# Altium PCB cs301_07b.PcbDoc (part 2 of 2)
Units mil, origin at the board's own origin, x right, y up, seen from the top; angles counter-clockwise.
Board outline 3480 x 5007.33 mil, 2 copper layers (Top Layer, Bottom Layer); 134 components, 90 nets, 408 pads, 151 vias.
Unrouted connection lines stored in the file: 2.
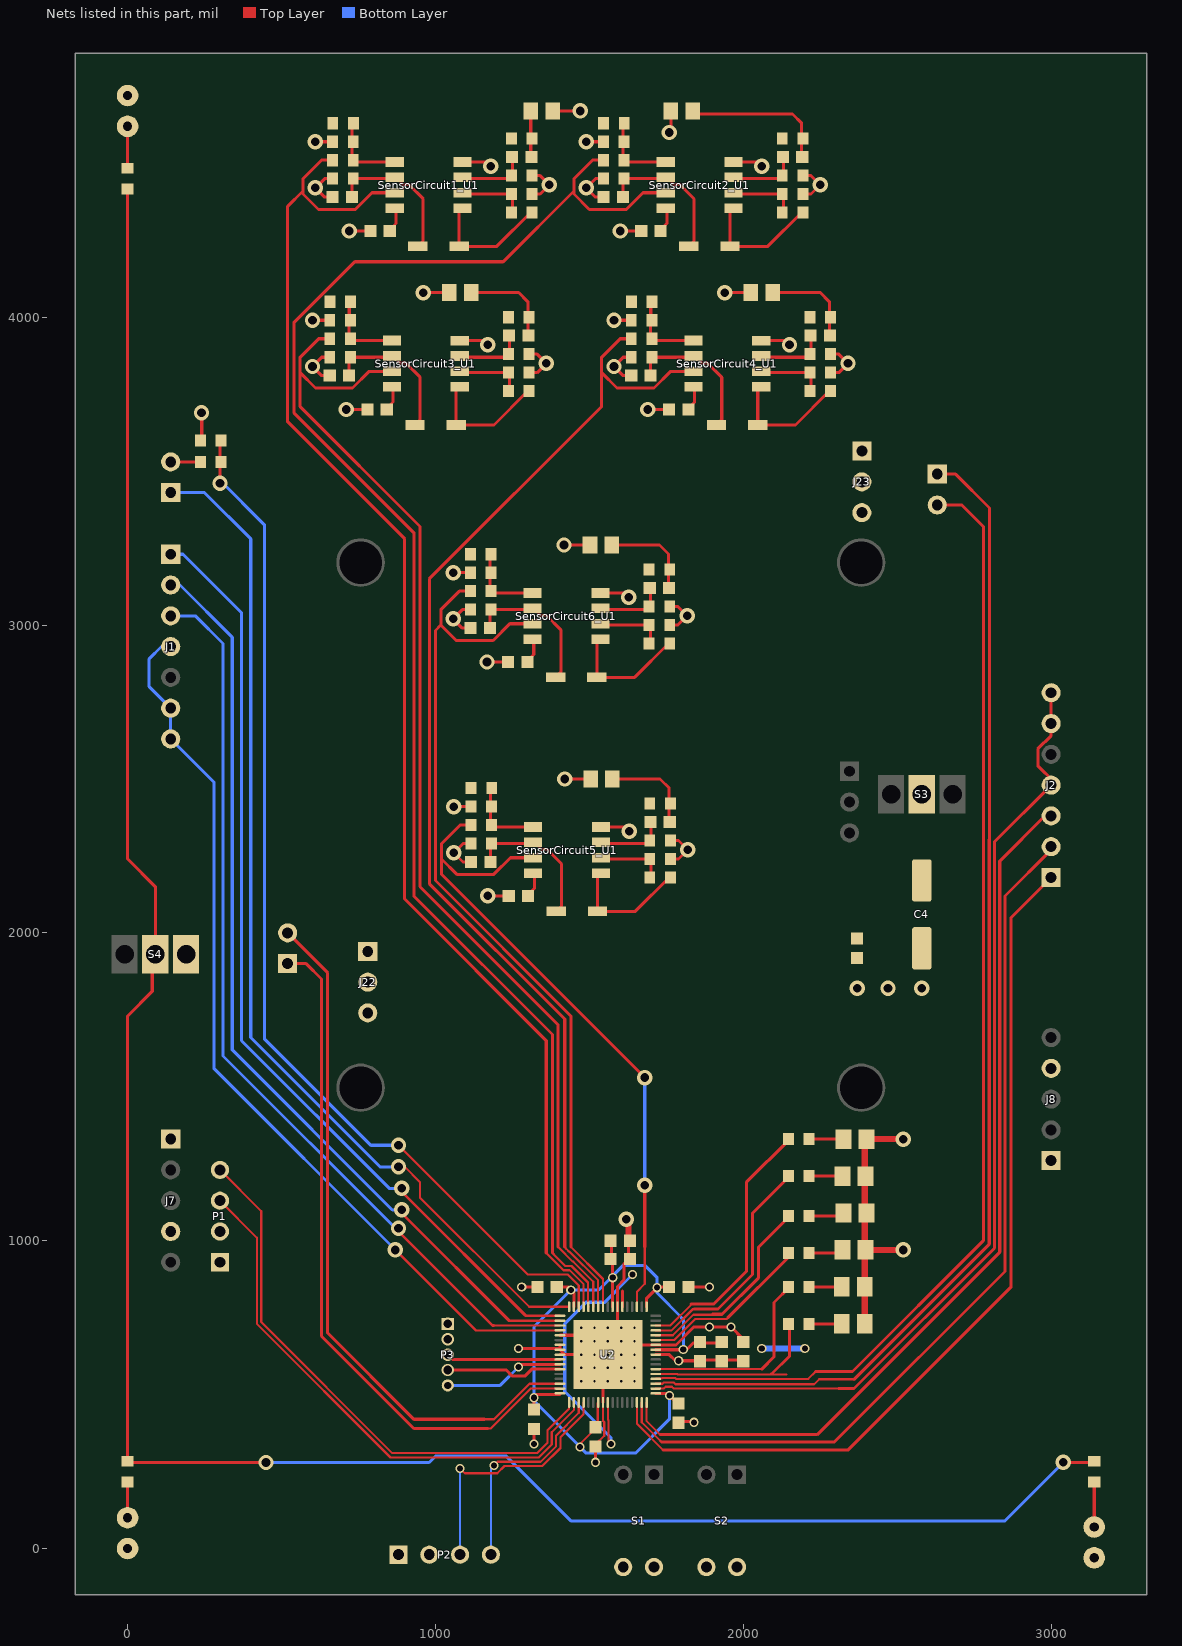
[diagram p2: the nets of this part, all layers, seen from the top]

## Via types
v1: diameter 50, hole 28, Top Layer to Bottom Layer, 99 vias
v2: diameter 19.68, hole 7.87, Top Layer to Bottom Layer, 25 vias
v3: diameter 30, hole 20, Top Layer to Bottom Layer, 23 vias
v4: diameter 40, hole 28, Top Layer to Bottom Layer, 4 vias

## Nets (pads, with @x,y where several pads share a name; then routed paths per layer and width w, separated by ;. In a path a pad name is that pad's centre, name@x,y a point inside that pad or via, vN(x,y) a via of type N, cw(c..) or ccw(c..) an arc to the next point about the centre after c; other vN are vias at no path point) (continued)
GND: C4.2 C5.1 C6.1 C7.1 C8.1 C9.1 C10.1 C11.1 C12.1 C13.1 C14.1 C15.1 D1.K D2.K D3.K D4.2 D5.2 D6.2 D7.2 D8.2 D9.2 J7.4 J8.4 J22.1 J22.2 J22.3 J23.1 J23.2 J23.3 P1.2 P2.2 P3.2 R13.2 SensorCircuit1_C2.1 SensorCircuit1_C3.2 SensorCircuit1_D1.1 SensorCircuit1_R1.2 SensorCircuit1_R5.1 SensorCircuit1_R6.1 SensorCircuit1_R8.1 SensorCircuit1_U1.4 SensorCircuit2_C2.1 SensorCircuit2_C3.2 SensorCircuit2_D1.1 SensorCircuit2_R1.2 SensorCircuit2_R5.1 SensorCircuit2_R6.1 SensorCircuit2_R8.1 SensorCircuit2_U1.4 SensorCircuit3_C2.1 SensorCircuit3_C3.2 SensorCircuit3_D1.1 SensorCircuit3_R1.2 SensorCircuit3_R5.1 SensorCircuit3_R6.1 SensorCircuit3_R8.1 SensorCircuit3_U1.4 SensorCircuit4_C2.1 SensorCircuit4_C3.2 SensorCircuit4_D1.1 SensorCircuit4_R1.2 SensorCircuit4_R5.1 SensorCircuit4_R6.1 SensorCircuit4_R8.1 SensorCircuit4_U1.4 SensorCircuit5_C2.1 SensorCircuit5_C3.2 SensorCircuit5_D1.1 SensorCircuit5_R1.2 SensorCircuit5_R5.1 SensorCircuit5_R6.1 SensorCircuit5_R8.1 SensorCircuit5_U1.4 SensorCircuit6_C2.1 SensorCircuit6_C3.2 SensorCircuit6_D1.1 SensorCircuit6_R1.2 SensorCircuit6_R5.1 SensorCircuit6_R6.1 SensorCircuit6_R8.1 SensorCircuit6_U1.4 U2.5 U2.7 U2.8 U2.9 U2.25 U2.43 U2.45 U2.58 U2.69 | length 6975.5
  Top Layer w7: C10.1@1520,334.88 1520,337.72 1548.22,365.94 1548.22,410.1 1544.25,414.06 U2.25@1544.25,474.49 ; v1(1620,1070) v1@1627.56,1062.44 ; v3@1837.56,412.44 v3(1840,410) ; D4.2@2394.8,1324.8 D4.2@2400,1330
  Top Layer w10: v1(240,3690) 240.94,3689.06 R13.2@240.94,3600 ; v1(600.47,3990) SensorCircuit3_R8.1@660.47,3990 ; v1(610,4570) SensorCircuit1_R8.1@670,4570 ; SensorCircuit3_C2.1@660.47,3810 630.47,3810 v1(600.47,3840) 630.47,3870 SensorCircuit3_R5.1@660.47,3870 ; SensorCircuit1_C2.1@670,4390 640,4390 v1(610,4420) 640,4450 SensorCircuit1_R5.1@670,4450 ; v1(710.47,3700) SensorCircuit3_C3.2@778.98,3700 SensorCircuit3_C3.2@782.91,3700 ; v1(720,4280) SensorCircuit1_C3.2@788.5,4280 SensorCircuit1_C3.2@792.44,4280 ; v1(960.47,4080) SensorCircuit3_D1.1@1045.04,4080 ; v1(1057.56,3170) SensorCircuit6_R8.1@1117.56,3170 ; v1(1059.53,2410) SensorCircuit5_R8.1@1119.53,2410 ; SensorCircuit3_U1.4@1074.88,3924.13 1166.34,3924.13 1170.47,3920 v1(1170.47,3910) ; SensorCircuit1_U1.4@1084.41,4504.13 1175.87,4504.13 1180,4500 v1(1180,4490) ; SensorCircuit6_C2.1@1117.56,2990 1087.56,2990 v1(1057.56,3020) 1087.56,3050 SensorCircuit6_R5.1@1117.56,3050 ; SensorCircuit5_C2.1@1119.53,2230 1089.53,2230 v1(1059.53,2260) 1089.53,2290 SensorCircuit5_R5.1@1119.53,2290 ; v1(1167.56,2880) SensorCircuit6_C3.2@1236.06,2880 SensorCircuit6_C3.2@1240,2880 ; v1(1169.53,2120) SensorCircuit5_C3.2@1238.03,2120 SensorCircuit5_C3.2@1241.97,2120 ; v3(1270,650) 1400.24,650 U2.8@1404.49,645.75 ; v3(1280,850) C6.1@1334.88,850 ; SensorCircuit3_R1.2@1300,3820 1330.47,3820 v1(1360.47,3850) 1330.47,3880 SensorCircuit3_R6.1@1300,3880 ; SensorCircuit1_R1.2@1309.53,4400 1340,4400 v1(1370,4430) 1340,4460 SensorCircuit1_R6.1@1309.53,4460 ; v3(1320,340) C9.1@1320,392.44 ; SensorCircuit1_D1.1@1380.87,4670 v1(1470,4670) ; U2.9@1404.49,630 U2.9@1420.24,630 ; U2.7@1404.49,661.5 U2.8@1404.49,645.75 ; U2.5@1404.49,692.99 1497.01,692.99 v2(1516.69,673.31) v2(1560,630) ; v1(1417.56,3260) SensorCircuit6_D1.1@1502.13,3260 ; v1(1419.53,2500) SensorCircuit5_D1.1@1504.09,2500 ; v1(1490,4570) SensorCircuit2_R8.1@1550,4570 ; C10.1@1510,342.44 1520,332.44 v3(1520,280) ; SensorCircuit6_U1.4@1531.97,3104.13 1623.43,3104.13 1627.56,3100 v1(1627.56,3090) ; SensorCircuit5_U1.4@1533.94,2344.13 1625.39,2344.13 1629.53,2340 v1(1629.53,2330) ; U2.25@1544.25,474.49 1544.25,614.25 v2(1560,630) ; SensorCircuit2_C2.1@1550,4390 1520,4390 v1(1490,4420) 1520,4450 SensorCircuit2_R5.1@1550,4450 ; v1(1580,3990) SensorCircuit4_R8.1@1640,3990 ; v1(1600,4280) SensorCircuit2_C3.2@1668.5,4280 SensorCircuit2_C3.2@1672.44,4280 ; C13.1@1627.56,1000 1627.56,940 1612.72,925.16 1612.72,872.72 1591.5,851.5 U2.58@1591.5,785.51 U2.69@1591.5,661.5 ; SensorCircuit4_C2.1@1640,3810 1610,3810 v1(1580,3840) 1610,3870 SensorCircuit4_R5.1@1640,3870 ; v1(1690,3700) SensorCircuit4_C3.2@1758.5,3700 SensorCircuit4_C3.2@1762.44,3700 ; U2.43@1715.51,630 1760,630 1780,610 v3(1790,610) 1857.56,610 1860,612.44 1930,612.44 2000,612.44 ; SensorCircuit6_R1.2@1757.09,3000 1787.56,3000 v1(1817.56,3030) 1787.56,3060 SensorCircuit6_R6.1@1757.09,3060 ; SensorCircuit5_R1.2@1759.06,2240 1789.53,2240 v1(1819.53,2270) 1789.53,2300 SensorCircuit5_R6.1@1759.06,2300 ; v1(1760,4600) 1764.57,4604.57 SensorCircuit2_D1.1@1764.57,4670 ; C8.1@1790,412.44 v3@1837.56,412.44 ; C7.1@1817.56,850 v3(1890,850) ; v1(1940,4080) SensorCircuit4_D1.1@2024.57,4080 ; SensorCircuit2_U1.4@1964.41,4504.13 2055.87,4504.13 2060,4500 v1(2060,4490) ; C15.1@2000,667.56 2000,680 v3(1960,720) v3(1890,720) 1840,720 1781.5,661.5 U2.45@1715.51,661.5 1665.69,661.5 1655.66,651.46 1637.57,651.46 1627.54,661.5 U2.69@1591.5,661.5 ; SensorCircuit4_U1.4@2054.41,3924.13 2145.87,3924.13 2150,3920 v1(2150,3910) ; SensorCircuit2_R1.2@2189.53,4400 2220,4400 v1(2250,4430) 2220,4460 SensorCircuit2_R6.1@2189.53,4460 ; SensorCircuit4_R1.2@2279.53,3820 2310,3820 v1(2340,3850) 2310,3880 SensorCircuit4_R6.1@2279.53,3880 ; U2.8@1404.49,645.75 U2.9@1420.24,630 ; U2.9@1420.24,630 v2(1473.39,630) v2(1516.69,630) v2(1560,630) ; v2(1560,630) U2.69@1591.5,661.5
  Top Layer w20: C13.1@1627.56,1000 v1@1627.56,1062.44 ; D9.2@2394.8,730 D8.2@2394.8,850 D4.2@2394.8,1324.8 ; D7.2@2397.4,970 v1(2520,970) ; D4.2@2400,1330 v1(2520,1330)
  other v1: 3140,-30 980,-20 0,0 140,1030 300,1030 3000,1560 780,1740 2370,1820 2470,1820 2580,1820 780,1840 780,1940 2385,3365 2385,3465 2385,3565 0,4720
  other v2: 1473.39,543.39 1516.69,543.39 1560,543.39 1603.31,543.39 1646.61,543.39 1473.39,586.69 1516.69,586.69 1560,586.69 1603.31,586.69 1646.61,586.69 1603.31,630 1646.61,630 1473.39,673.31 1560,673.31 1603.31,673.31 1646.61,673.31 1473.39,716.61 1516.69,716.61 1560,716.61 1603.31,716.61 1646.61,716.61
  other v4: 1040,680
Ibat: J11.1 U2.68 | length 3367.7
  Top Layer w7: v1(880,1240) 900,1240 950,1190 950,1140 1304.49,785.51 U2.68@1434.02,785.51
  Bottom Layer w10: J11.1@140,3430 250,3430 400,3280 400,1660 820,1240 v1(880,1240)
LED0: R14.1 U2.49 | length 859.1
  Top Layer w7: U2.49@1715.51,724.49 1763.17,724.49 1833.68,795
  Top Layer w10: 1830,795 1833.68,795 1905,795 2010,900 2010,1189.53 R14.1@2150.47,1330
LED1: R15.1 U2.48 | length 756.5
  Top Layer w7: U2.48@1715.51,708.74 1767.22,708.74 1836.84,778.36
  Top Layer w10: 1840,778 1918,778 2030,890 2030,1089.53 R15.1@2150.47,1210
LED2: R16.1 U2.47 | length 653.7
  Top Layer w7: U2.47@1715.51,692.99 1771.27,692.99 1837.78,759.5 1899.5,759.5 1900,760
  Top Layer w10: 1899.5,761 1931,761 2050,880 2050,979.53 R16.1@2150.47,1080
LED3: R17.1 U2.46 | length 557.7
  Top Layer w7: U2.46@1715.51,677.24 1775.32,677.24 1843.58,745.5 1945.5,745.5 1950,750
  Top Layer w10: 1950,750 2150.47,950.47 R17.1@2150.47,960
LED4: R18.1 U2.40 | length 649.2
  Top Layer w7: U2.40@1715.51,582.76 2060,582.76
  Top Layer w10: 2060,582.76 2100,622.76 2100,799.53 R18.1@2150.47,850
LED5: R19.1 U2.39 | length 614.8
  Top Layer w7: U2.39@1715.51,567.01 1716,567.5 1785.52,567.5 1787.76,565.26 2140,565.26
  Top Layer w10: 2090,566.76 2091.5,566.76 2150.47,625.73 R19.1@2150.47,730
M1_D1: J1.1 U2.1 | length 3108.5
  Top Layer w7: 1292.01,755.98 U2.1@1404.49,755.98
  Top Layer w10: v1(890,1170) 890,1160 1292.01,757.99
  Bottom Layer w10: v1(140,3230) 180,3230 370,3040 370,1650 850,1170 v1(890,1170)
M1_D2: J1.4 J1.6 J1.7 U2.4 | length 2980.1
  Top Layer w7: 1130,708.74 U2.4@1404.49,708.74
  Top Layer w10: v1(870,970) 1130,710
  Bottom Layer w10: v1(140,2930) 110,2930 70,2890 70,2800 v1(140,2730) v1(140,2630) 280,2490 280,1560 v1(870,970)
M1_IN1: J1.3 U2.3 | length 3010.3
  Top Layer w7: 1190,724.49 U2.3@1404.49,724.49
  Top Layer w10: v1(880,1040) 880,1030 1185.51,724.49 1190,724.49
  Bottom Layer w10: v1(140,3030) 220,3030 310,2940 310,1600 870,1040 v1(880,1040)
M1_IN2: J1.2 U2.2 | length 3045.3
  Top Layer w7: 1239.76,740.24 U2.2@1404.49,740.24
  Top Layer w10: v1(890,1100) 890,1090 1239.76,740.24 1239.88,740.12
  Bottom Layer w10: v1(140,3130) 170,3130 340,2960 340,1620 860,1100 v1(890,1100)
M1_QA: J14.1 U2.16 | length 2243.2
  Top Layer w7: 1170,390 1180,390 1309.76,519.76 U2.16@1404.49,519.76
  Top Layer w10: v1(520,1900) 580,1900 630,1850 630,690 930,390 1170,390
M1_QB: J14.2 U2.15 | length 2272.2
  Top Layer w7: 1160,420 1190,420 1305.51,535.51 U2.15@1404.49,535.51
  Top Layer w10: v1(520,2000) 650,1870 650,700 930,420 1160,420
M2_D1: J2.1 U2.32 | length 2923.9
  Top Layer w7: U2.32@1654.49,474.49 1654.49,405.11 1740,319.6
  Top Layer w10: 1740,319.6 2339.6,319.6 2870,850 2870,2050 v1(3000,2180)
M2_D2: J2.4 J2.6 J2.7 U2.36 | length 3218.3
  Top Layer w7: U2.36@1715.51,519.76 1742.06,519.76 1747.8,525.5 1768.12,525.5 1773.86,519.76 2309.76,519.76
  Top Layer w10: 2309.76,519.76 2359.76,519.76 2816,976 2816,2296 v1(3000,2480) 3010,2490 2957,2543 2957,2597.81 3000,2640.81 v1(3000,2680) v1(3000,2780)
M2_IN1: J2.3 U2.34 | length 2969.2
  Top Layer w7: U2.34@1685.98,474.49 1685.98,414.02 1730,370
  Top Layer w10: 1730,370 2240,370 2833,963 2833,2233 2980,2380 v1(3000,2380)
M2_IN2: J2.2 U2.33 | length 2942.5
  Top Layer w7: U2.33@1670.24,474.49 1670.24,409.76 1730,350 1730.2,350 1734.2,346
  Top Layer w10: 1734.2,346 2296,346 2850,900 2850,2120 3000,2270 v1(3000,2280)
M2_QA: J15.1 U2.37 | length 3883.1
  Top Layer w7: U2.37@1715.51,535.51 1738.01,535.51 1742,539.5 1773.92,539.5 1779.66,533.76 2230,533.76 2246.24,550 2360,550
  Top Layer w10: 2360,550 2799,989 2799,2303.04 2800,2304.04 2800,3380 2690,3490 J15.1@2630,3490
M2_QB: J15.2 U2.38 | length 3751.2
  Top Layer w7: U2.38@1715.51,551.26 1716.82,552.57 1735.27,552.57 1736.2,553.5 1779.72,553.5 1781.96,551.26 2211.26,551.26 2235,575
  Top Layer w10: 2235,575 2355,575 2780,1000 2780,3320 2710,3390 J15.2@2630,3390
NetD1_A: D1.A R9.2 | length 120.5
  Top Layer w10: v1(0,100) R9.2@0,220.47
NetD2_A: D2.A R10.2 | length 140
  Top Layer w10: R10.2@0,4480 v1(0,4620)
NetD3_A: D3.A R11.2 | length 150.5
  Top Layer w10: v1(3140,70) R11.2@3140,220.47
NetD4_1: D4.1 R14.2 | length 105.7
  Top Layer w10: R14.2@2219.53,1330 D4.1@2325.2,1330
NetD5_1: D5.1 R15.2 | length 113.1
  Top Layer w10: R15.2@2209.53,1210 D5.1@2322.6,1210
NetD6_1: D6.1 R16.2 | length 119.8
  Top Layer w10: R16.2@2209.53,1080 2315.2,1080 D6.1@2325.2,1090
NetD7_1: D7.1 R17.2 | length 117.2
  Top Layer w10: R17.2@2209.53,960 2312.6,960 D7.1@2322.6,970
NetD8_1: D8.1 R18.2 | length 110.5
  Top Layer w10: R18.2@2209.53,850 R18.2@2213.46,850 D8.1@2320,850
NetD9_1: D9.1 R19.2 | length 110.5
  Top Layer w10: R19.2@2209.53,730 D9.1@2320,730
NetJ11_2: J11.2 R12.1 | length 100.5
  Top Layer w10: J11.2@140,3530 R12.1@236.54,3530 R12.1@240.47,3530
NetR9_1: R9.1 R10.1 R11.1 S4.2 | length 7531
  Top Layer w10: R10.1@0,4420.94 0,2240 90,2150 S4.2@90,1930 80,1920 80,1810 0,1730 0,279.53 v1(449.53,279.53) v1@450,280 ; v1(3040,280) 3139.53,280 R11.1@3140,279.53
  Bottom Layer w10: v1(449.53,279.53) 979.53,279.53 1000,300 1230,300 1440,90 2850,90 v1(3040,280)
NetSensorCircuit1_C1_1: SensorCircuit1_C1.1 SensorCircuit1_R6.2 SensorCircuit1_U1.3 | length 232.7
  Top Layer w10: SensorCircuit1_U1.3@1084.41,4454.13 1088.54,4450 1240.47,4450 1250.47,4460 1250.47,4518.03 SensorCircuit1_C1.1@1252.44,4520
NetSensorCircuit1_C1_2: SensorCircuit1_C1.2 SensorCircuit1_D1.2 SensorCircuit1_R4.1 | length 151
  Top Layer w10: SensorCircuit1_C1.2@1307.56,4520 1309.53,4521.97 1309.53,4669.53 SensorCircuit1_D1.2@1310,4670
NetSensorCircuit1_C2_2: SensorCircuit1_C2.2 SensorCircuit1_D2.2 SensorCircuit1_R5.2 SensorCircuit1_U1.6 | length 484.6
  Top Layer w10: SensorCircuit1_C2.2@725.12,4390 729.06,4393.94 729.06,4450 SensorCircuit1_R5.2@732.99,4450 867.68,4450 871.81,4454.13 895,4430.94 913.46,4430.94 960,4384.4 960,4246.93 SensorCircuit1_D2.2@943.07,4230
NetSensorCircuit1_D2_1: SensorCircuit1_D2.1 SensorCircuit1_R2.2 SensorCircuit1_U1.1 | length 405.4
  Top Layer w10: SensorCircuit1_U1.1@1084.41,4354.13 1076.93,4346.65 SensorCircuit1_D2.1@1076.93,4230 1199.53,4230 SensorCircuit1_R2.2@1309.53,4340
NetSensorCircuit1_R1_1: SensorCircuit1_R1.1 SensorCircuit1_R2.1 SensorCircuit1_U1.2 | length 227.8
  Top Layer w10: SensorCircuit1_U1.2@1084.41,4404.13 1088.54,4400 1250.47,4400 SensorCircuit1_R2.1@1250.47,4340
NetSensorCircuit1_R3_1: SensorCircuit1_R3.1 SensorCircuit1_R7.2 SensorCircuit1_R8.2 SensorCircuit1_U1.5 | length 263
  Top Layer w10: SensorCircuit1_R7.2@729.06,4504.13 SensorCircuit1_U1.5@867.87,4504.13 SensorCircuit1_U1.5@871.81,4504.13 ; SensorCircuit1_R7.2@729.06,4510 729.06,4570 729.53,4570.47 SensorCircuit1_R3.1@729.53,4630
NetSensorCircuit2_C1_1: SensorCircuit2_C1.1 SensorCircuit2_R6.2 SensorCircuit2_U1.3 | length 232.7
  Top Layer w10: SensorCircuit2_U1.3@1964.41,4454.13 1968.54,4450 2120.47,4450 2130.47,4460 2130.47,4518.03 SensorCircuit2_C1.1@2132.44,4520
NetSensorCircuit2_C1_2: SensorCircuit2_C1.2 SensorCircuit2_D1.2 SensorCircuit2_R4.1 | length 473
  Top Layer w10: SensorCircuit2_D1.2@1840,4660 2160,4660 2189.53,4630.47 2189.53,4521.97 SensorCircuit2_C1.2@2187.56,4520
NetSensorCircuit2_C2_2: SensorCircuit2_C2.2 SensorCircuit2_D2.2 SensorCircuit2_R5.2 SensorCircuit2_U1.6 | length 484.6
  Top Layer w10: SensorCircuit2_C2.2@1605.12,4390 1609.06,4393.94 1609.06,4450 SensorCircuit2_R5.2@1612.99,4450 1747.68,4450 1751.81,4454.13 1775,4430.94 1793.46,4430.94 1840,4384.4 1840,4246.93 SensorCircuit2_D2.2@1823.07,4230
NetSensorCircuit2_D2_1: SensorCircuit2_D2.1 SensorCircuit2_R2.2 SensorCircuit2_U1.1 | length 405.4
  Top Layer w10: SensorCircuit2_U1.1@1964.41,4354.13 1956.93,4346.65 SensorCircuit2_D2.1@1956.93,4230 2079.53,4230 SensorCircuit2_R2.2@2189.53,4340
NetSensorCircuit2_R1_1: SensorCircuit2_R1.1 SensorCircuit2_R2.1 SensorCircuit2_U1.2 | length 227.8
  Top Layer w10: SensorCircuit2_U1.2@1964.41,4404.13 1968.54,4400 2130.47,4400 SensorCircuit2_R2.1@2130.47,4340
NetSensorCircuit2_R3_1: SensorCircuit2_R3.1 SensorCircuit2_R7.2 SensorCircuit2_R8.2 SensorCircuit2_U1.5 | length 263
  Top Layer w10: SensorCircuit2_R7.2@1609.06,4504.13 SensorCircuit2_U1.5@1747.87,4504.13 SensorCircuit2_U1.5@1751.81,4504.13 ; SensorCircuit2_R7.2@1609.06,4510 1609.06,4570 1609.53,4570.47 SensorCircuit2_R3.1@1609.53,4630
NetSensorCircuit3_C1_1: SensorCircuit3_C1.1 SensorCircuit3_R6.2 SensorCircuit3_U1.3 | length 232.7
  Top Layer w10: SensorCircuit3_U1.3@1074.88,3874.13 1079.02,3870 1230.94,3870 1240.94,3880 1240.94,3938.03 SensorCircuit3_C1.1@1242.91,3940
NetSensorCircuit3_C1_2: SensorCircuit3_C1.2 SensorCircuit3_D1.2 SensorCircuit3_R4.1 | length 307.6
  Top Layer w10: SensorCircuit3_D1.2@1115.91,4080 1270.47,4080 1300,4050.47 1300,3941.97 SensorCircuit3_C1.2@1298.03,3940
NetSensorCircuit3_C2_2: SensorCircuit3_C2.2 SensorCircuit3_D2.2 SensorCircuit3_R5.2 SensorCircuit3_U1.6 | length 484.6
  Top Layer w10: SensorCircuit3_C2.2@715.59,3810 719.53,3813.94 719.53,3870 SensorCircuit3_R5.2@723.46,3870 858.15,3870 862.28,3874.13 885.47,3850.95 903.93,3850.95 950.47,3804.4 950.47,3666.93 SensorCircuit3_D2.2@933.54,3650
NetSensorCircuit3_D2_1: SensorCircuit3_D2.1 SensorCircuit3_R2.2 SensorCircuit3_U1.1 | length 405.4
  Top Layer w10: SensorCircuit3_U1.1@1074.88,3774.13 1067.4,3766.65 SensorCircuit3_D2.1@1067.4,3650 1190,3650 SensorCircuit3_R2.2@1300,3760
NetSensorCircuit3_R1_1: SensorCircuit3_R1.1 SensorCircuit3_R2.1 SensorCircuit3_U1.2 | length 227.8
  Top Layer w10: SensorCircuit3_U1.2@1074.88,3824.13 1079.02,3820 1240.94,3820 SensorCircuit3_R2.1@1240.94,3760
NetSensorCircuit3_R3_1: SensorCircuit3_R3.1 SensorCircuit3_R7.2 SensorCircuit3_R8.2 SensorCircuit3_U1.5 | length 263
  Top Layer w10: SensorCircuit3_R7.2@719.53,3924.13 SensorCircuit3_U1.5@858.35,3924.13 SensorCircuit3_U1.5@862.28,3924.13 ; SensorCircuit3_R7.2@719.53,3930 719.53,3990 720,3990.47 SensorCircuit3_R3.1@720,4050
NetSensorCircuit4_C1_1: SensorCircuit4_C1.1 SensorCircuit4_R6.2 SensorCircuit4_U1.3 | length 232.7
  Top Layer w10: SensorCircuit4_U1.3@2054.41,3874.13 2058.54,3870 2210.47,3870 2220.47,3880 2220.47,3938.03 SensorCircuit4_C1.1@2222.44,3940
NetSensorCircuit4_C1_2: SensorCircuit4_C1.2 SensorCircuit4_D1.2 SensorCircuit4_R4.1 | length 307.6
  Top Layer w10: SensorCircuit4_D1.2@2095.43,4080 2250,4080 2279.53,4050.47 2279.53,3941.97 SensorCircuit4_C1.2@2277.56,3940
NetSensorCircuit4_C2_2: SensorCircuit4_C2.2 SensorCircuit4_D2.2 SensorCircuit4_R5.2 SensorCircuit4_U1.6 | length 484.6
  Top Layer w10: SensorCircuit4_C2.2@1695.12,3810 1699.06,3813.94 1699.06,3870 SensorCircuit4_R5.2@1702.99,3870 1837.68,3870 1841.81,3874.13 1865,3850.94 1883.46,3850.94 1930,3804.4 1930,3666.93 SensorCircuit4_D2.2@1913.07,3650
NetSensorCircuit4_D2_1: SensorCircuit4_D2.1 SensorCircuit4_R2.2 SensorCircuit4_U1.1 | length 405.4
  Top Layer w10: SensorCircuit4_U1.1@2054.41,3774.13 2046.93,3766.65 SensorCircuit4_D2.1@2046.93,3650 2169.53,3650 SensorCircuit4_R2.2@2279.53,3760
NetSensorCircuit4_R1_1: SensorCircuit4_R1.1 SensorCircuit4_R2.1 SensorCircuit4_U1.2 | length 227.8
  Top Layer w10: SensorCircuit4_U1.2@2054.41,3824.13 2058.54,3820 2220.47,3820 SensorCircuit4_R2.1@2220.47,3760
NetSensorCircuit4_R3_1: SensorCircuit4_R3.1 SensorCircuit4_R7.2 SensorCircuit4_R8.2 SensorCircuit4_U1.5 | length 263
  Top Layer w10: SensorCircuit4_R7.2@1699.06,3924.13 SensorCircuit4_U1.5@1837.87,3924.13 SensorCircuit4_U1.5@1841.81,3924.13 ; SensorCircuit4_R7.2@1699.06,3930 1699.06,3990 1699.53,3990.47 SensorCircuit4_R3.1@1699.53,4050
NetSensorCircuit5_C1_1: SensorCircuit5_C1.1 SensorCircuit5_R6.2 SensorCircuit5_U1.3 | length 232.7
  Top Layer w10: SensorCircuit5_U1.3@1533.94,2294.13 1538.07,2290 1690,2290 1700,2300 1700,2358.03 SensorCircuit5_C1.1@1701.97,2360
NetSensorCircuit5_C1_2: SensorCircuit5_C1.2 SensorCircuit5_D1.2 SensorCircuit5_R4.1 | length 307.6
  Top Layer w10: SensorCircuit5_D1.2@1574.96,2500 1729.53,2500 1759.06,2470.47 1759.06,2361.97 SensorCircuit5_C1.2@1757.09,2360
NetSensorCircuit5_C2_2: SensorCircuit5_C2.2 SensorCircuit5_D2.2 SensorCircuit5_R5.2 SensorCircuit5_U1.6 | length 484.6
  Top Layer w10: SensorCircuit5_C2.2@1174.65,2230 1178.58,2233.94 1178.58,2290 SensorCircuit5_R5.2@1182.52,2290 1317.2,2290 1321.34,2294.13 1344.53,2270.94 1362.98,2270.94 1409.53,2224.4 1409.53,2086.93 SensorCircuit5_D2.2@1392.6,2070
NetSensorCircuit5_D2_1: SensorCircuit5_D2.1 SensorCircuit5_R2.2 SensorCircuit5_U1.1 | length 405.4
  Top Layer w10: SensorCircuit5_U1.1@1533.94,2194.13 1526.46,2186.65 SensorCircuit5_D2.1@1526.46,2070 1649.06,2070 SensorCircuit5_R2.2@1759.06,2180
NetSensorCircuit5_R1_1: SensorCircuit5_R1.1 SensorCircuit5_R2.1 SensorCircuit5_U1.2 | length 227.8
  Top Layer w10: SensorCircuit5_U1.2@1533.94,2244.13 1538.07,2240 1700,2240 SensorCircuit5_R2.1@1700,2180
NetSensorCircuit5_R3_1: SensorCircuit5_R3.1 SensorCircuit5_R7.2 SensorCircuit5_R8.2 SensorCircuit5_U1.5 | length 263
  Top Layer w10: SensorCircuit5_R7.2@1178.58,2344.13 SensorCircuit5_U1.5@1317.4,2344.13 SensorCircuit5_U1.5@1321.34,2344.13 ; SensorCircuit5_R7.2@1178.58,2350 1178.58,2410 1179.06,2410.47 SensorCircuit5_R3.1@1179.06,2470
NetSensorCircuit6_C1_1: SensorCircuit6_C1.1 SensorCircuit6_R6.2 SensorCircuit6_U1.3 | length 232.7
  Top Layer w10: SensorCircuit6_U1.3@1531.97,3054.13 1536.1,3050 1688.03,3050 1698.03,3060 1698.03,3118.03 SensorCircuit6_C1.1@1700,3120
NetSensorCircuit6_C1_2: SensorCircuit6_C1.2 SensorCircuit6_D1.2 SensorCircuit6_R4.1 | length 307.6
  Top Layer w10: SensorCircuit6_D1.2@1572.99,3260 1727.56,3260 1757.09,3230.47 1757.09,3121.97 SensorCircuit6_C1.2@1755.12,3120
NetSensorCircuit6_C2_2: SensorCircuit6_C2.2 SensorCircuit6_D2.2 SensorCircuit6_R5.2 SensorCircuit6_U1.6 | length 484.6
  Top Layer w10: SensorCircuit6_C2.2@1172.68,2990 1176.61,2993.94 1176.61,3050 SensorCircuit6_R5.2@1180.55,3050 1315.24,3050 1319.37,3054.13 1342.56,3030.94 1361.02,3030.94 1407.56,2984.4 1407.56,2846.93 SensorCircuit6_D2.2@1390.63,2830
NetSensorCircuit6_D2_1: SensorCircuit6_D2.1 SensorCircuit6_R2.2 SensorCircuit6_U1.1 | length 405.4
  Top Layer w10: SensorCircuit6_U1.1@1531.97,2954.13 1524.49,2946.65 SensorCircuit6_D2.1@1524.49,2830 1647.09,2830 SensorCircuit6_R2.2@1757.09,2940
NetSensorCircuit6_R1_1: SensorCircuit6_R1.1 SensorCircuit6_R2.1 SensorCircuit6_U1.2 | length 227.8
  Top Layer w10: SensorCircuit6_U1.2@1531.97,3004.13 1536.1,3000 1698.03,3000 SensorCircuit6_R2.1@1698.03,2940
NetSensorCircuit6_R3_1: SensorCircuit6_R3.1 SensorCircuit6_R7.2 SensorCircuit6_R8.2 SensorCircuit6_U1.5 | length 263
  Top Layer w10: SensorCircuit6_R7.2@1176.61,3104.13 SensorCircuit6_U1.5@1315.43,3104.13 SensorCircuit6_U1.5@1319.37,3104.13 ; SensorCircuit6_R7.2@1176.61,3110 1176.61,3170 1177.09,3170.47 SensorCircuit6_R3.1@1177.09,3230
NetU2_26: U2.26 U2.57 | length 928.8
  Top Layer w7: U2.26@1560,474.49 1560,418.11 1562.22,415.9 1562.22,347.78 v3(1570,340)
  Top Layer w10: U2.57@1607.24,785.51 1607.24,837.24
  Bottom Layer w10: v3(1570,340) 1570,360 1420,510 1420,730 1490,800 1550,800 v3(1640,890)
RESET: P3.3 U2.10 | length 371
  Top Layer w10: v4(1040,630) 1055.75,614.25 U2.10@1404.49,614.25
RX1: P2.4 U2.20 | length 694.5
  Top Layer w7: v3(1190,270) 1202,282 1341.6,282 1392,332.4 1392,367.47 1465.51,440.98 U2.20@1465.51,474.49
  Bottom Layer w7: P2.4@1180,-20 1180,260 v3(1190,270)
RX2: P1.4 U2.18 | length 1829.5
  Top Layer w7: v1(300,1230) 434,1096 434,736 860,310 1330,310 1364,344 1364,384 1434.02,454.02 U2.18@1434.02,474.49
SO1: SensorCircuit1_R7.1 SensorCircuit1_U1.7 U2.65 | length 4574.8
  Top Layer w7: 1360,960.2 1416.2,904 1436,904 1481.26,858.74 U2.65@1481.26,785.51
  Top Layer w10: SensorCircuit1_R7.1@670,4510 SensorCircuit1_R7.1@666.06,4510 630,4510 570,4450 570,4410 ; SensorCircuit1_U1.7@871.81,4404.13 SensorCircuit1_U1.7@867.87,4404.13 794.13,4404.13 740,4350 620,4350 570,4400 570,4410 ; 1360,960.2 1360,1650 900,2110 900,3280 520,3660 520,4360 570,4410
SO2: SensorCircuit2_R7.1 SensorCircuit2_U1.7 U2.64 | length 5211.5
  Top Layer w7: 1380,960 1390,950 1422,918 1441.8,918 1495.7,864.1 1495.7,786.82 U2.64@1497.01,785.51
  Top Layer w10: 1380,960 1380,1670 930,2120 930,3300 540,3690 540,3981.85 738.15,4180 1220,4180 1450,4410 ; SensorCircuit2_R7.1@1550,4510 SensorCircuit2_R7.1@1546.06,4510 1510,4510 1450,4450 1450,4410 ; SensorCircuit2_U1.7@1751.81,4404.13 SensorCircuit2_U1.7@1747.87,4404.13 1674.13,4404.13 1620,4350 1500,4350 1450,4400 1450,4410
SO3: SensorCircuit3_R7.1 SensorCircuit3_U1.7 U2.63 | length 3950.5
  Top Layer w7: 1398.08,980 1399.6,980 1399.6,978.48 1446.08,932 1447.6,932 1512.76,866.84 U2.63@1512.76,785.51
  Top Layer w10: SensorCircuit3_R7.1@660.47,3930 SensorCircuit3_R7.1@656.54,3930 620.47,3930 560.47,3870 560.47,3820 ; SensorCircuit3_U1.7@862.28,3824.13 SensorCircuit3_U1.7@858.35,3824.13 784.61,3824.13 730.47,3770 610.47,3770 560.47,3820 ; 1398.08,980 1398.08,1701.92 950,2150 950,3320 560.47,3709.53 560.47,3820
SO4: SensorCircuit4_R7.1 SensorCircuit4_U1.7 U2.62 | length 4014.6
  Top Layer w7: 1420,980 1424.5,975.5 1424.5,973.58 1433.58,964.5 1435.5,964.5 1528.5,871.5 U2.62@1528.5,785.51
  Top Layer w10: 1420,980 1420,1720 980,2160 980,3150 1540,3710 1540,3820 ; SensorCircuit4_R7.1@1640,3930 SensorCircuit4_R7.1@1636.06,3930 1600,3930 1540,3870 1540,3820 ; SensorCircuit4_U1.7@1841.81,3824.13 SensorCircuit4_U1.7@1837.87,3824.13 1764.13,3824.13 1710,3770 1590,3770 1540,3820
SO5: SensorCircuit5_R7.1 SensorCircuit5_U1.7 U2.54 | length 2258.4
  Top Layer w7: U2.54@1654.49,785.51 1654.49,834.49 1680,860 1680,980
  Top Layer w10: SensorCircuit5_R7.1@1119.53,2350 SensorCircuit5_R7.1@1115.59,2350 1079.53,2350 1019.53,2290 1019.53,2240 ; SensorCircuit5_U1.7@1321.34,2244.13 SensorCircuit5_U1.7@1317.4,2244.13 1243.66,2244.13 1189.53,2190 1069.53,2190 1019.53,2240 ; 1680,980 v1(1680,1180) ; v1(1680,1530) 1019.53,2190.47 1019.53,2240
  Bottom Layer w10: v1(1680,1180) v1(1680,1530)
SO6: SensorCircuit6_R7.1 SensorCircuit6_U1.7 U2.61 | length 2967
  Top Layer w7: 1440,980 1544.25,875.75 U2.61@1544.25,785.51
  Top Layer w10: SensorCircuit6_R7.1@1117.56,3110 SensorCircuit6_R7.1@1113.62,3110 1077.56,3110 1017.56,3050 1017.56,3000 ; SensorCircuit6_U1.7@1319.37,3004.13 SensorCircuit6_U1.7@1315.43,3004.13 1241.69,3004.13 1187.56,2950 1067.56,2950 1017.56,3000 ; 1440,980 1440,1730 1000,2170 1000,2982.44 1017.56,3000
SWDCK: P3.4 U2.12 | length 382.2
  Top Layer w10: v4(1040,580) 1230,580 1250,560 1290,560 1312.76,582.76 U2.12@1404.49,582.76
SWDIO: P3.5 U2.11 | length 392.9
  Top Layer w10: v3(1270,590) 1278.5,598.5 U2.11@1404.49,598.5
  Bottom Layer w10: P3.5@1040,530 1210,530 v3(1270,590)
TX1: P2.3 U2.21 | length 825.5
  Top Layer w7: v3(1080,260) 1095.5,244.5 1200.56,244.5 1224.06,268 1347.4,268 1406,326.6 1406,361.67 1481.26,436.93 U2.21@1481.26,474.49
  Bottom Layer w7: P2.3@1080,-20 v3(1080,260)
TX2: P1.3 U2.19 | length 1771
  Top Layer w7: v1(300,1130) 420,1010 420,730 854,296 1335.8,296 1378,338.2 1378,378 1449.76,449.76 U2.19@1449.76,474.49
Vbat: R12.2 R13.1 U2.66 | length 3436.5
  Top Layer w7: v1(880,1310) 1300,890 1430,890 1465.51,854.49 U2.66@1465.51,785.51
  Top Layer w10: v1(300,3460) 299.53,3460.47 299.53,3530 300,3530.47 R13.1@300,3600
  Bottom Layer w10: v1@300,3470 444.04,3325.96 444.04,1655.96 790,1310 v1(880,1310)
VCC: C4.1 C5.2 C6.2 C7.2 C8.2 C9.2 C10.2 C11.2 C12.2 C13.2 C14.2 C15.2 J7.1 J8.1 P1.1 P2.1 P3.1 S1.3 S1.4 S2.3 S2.4 S3.2 S4.3 SensorCircuit1_C3.1 SensorCircuit1_R3.2 SensorCircuit1_R4.2 SensorCircuit1_U1.8 SensorCircuit2_C3.1 SensorCircuit2_R3.2 SensorCircuit2_R4.2 SensorCircuit2_U1.8 SensorCircuit3_C3.1 SensorCircuit3_R3.2 SensorCircuit3_R4.2 SensorCircuit3_U1.8 SensorCircuit4_C3.1 SensorCircuit4_R3.2 SensorCircuit4_R4.2 SensorCircuit4_U1.8 SensorCircuit5_C3.1 SensorCircuit5_R3.2 SensorCircuit5_R4.2 SensorCircuit5_U1.8 SensorCircuit6_C3.1 SensorCircuit6_R3.2 SensorCircuit6_R4.2 SensorCircuit6_U1.8 U2.17 U2.24 U2.35 U2.44 U2.52 U2.59 U2.67 | length 3350.6
  Top Layer w7: v3(1470,330) 1470,340 1527.19,397.19 1527.19,473.18 U2.24@1528.5,474.49
  Top Layer w10: SensorCircuit3_C3.1@838.03,3700 862.28,3724.25 SensorCircuit3_U1.8@862.28,3774.13 ; SensorCircuit1_C3.1@847.56,4280 871.81,4304.25 SensorCircuit1_U1.8@871.81,4354.13 ; SensorCircuit6_C3.1@1295.12,2880 1319.37,2904.25 SensorCircuit6_U1.8@1319.37,2954.13 ; SensorCircuit5_C3.1@1297.09,2120 1321.34,2144.25 SensorCircuit5_U1.8@1321.34,2194.13 ; C9.2@1320,447.56 v3(1320,490) 1330.83,500.83 U2.17@1404.49,500.83 ; C6.2@1390,850 1430,850 v3(1439.88,840.12) 1449.76,830.24 U2.67@1449.76,785.51 ; C11.2@1572.44,940 C13.2@1572.44,1000 ; U2.59@1575.75,785.51 v3(1575.75,880) C11.2@1575.75,940 ; U2.52@1685.98,785.51 1685.98,813.54 v3(1720,847.56) 1722.44,850 C7.2@1762.44,850 ; U2.35@1715.51,504.02 1753.54,504.02 v3(1760,497.56) C8.2@1790,467.56 ; U2.44@1715.51,645.75 1803.93,645.75 v3(1805.18,647) 1817,647 1837.56,667.56 C14.2@1930,667.56 ; SensorCircuit2_C3.1@1727.56,4280 1751.81,4304.25 SensorCircuit2_U1.8@1751.81,4354.13 ; SensorCircuit4_C3.1@1817.56,3700 1841.81,3724.25 SensorCircuit4_U1.8@1841.81,3774.13
  Bottom Layer w10: v3(1760,497.56) 1760,420 1650,310 1490,310 v3(1470,330) 1320,480 v3(1320,490) 1320,720.24 v3(1439.88,840.12) 1530.12,840.12 1570,880 v3(1575.75,880) 1575.75,885.75 1610,920 1680,920 1720,880 v3(1720,847.56) 1720,830 1800.91,749.09 1800,748.19 1805.18,743.01 v3(1805.18,647)
  Bottom Layer w20: v3(2060,650) v3(2200,650)
  other v1: 880,-20 300,930 3000,1260 140,1330 2580,2450
  other v4: 1040,730
pads on no net: C4.0 J1.5 J2.5 J7.5 J8.2 J8.3 J8.5 S3.1 S4.1 U2.6 U2.13 U2.14 U2.31 U2.41 U2.42 U2.50 U2.51 U2.53 U2.55 U2.56 U2.60
copper on no net: | length 66.3
  Top Layer w10: 1607.24,837.24 1627.24,857.24 1640,870 1640,890
  other v1: 3000,2580 140,2830

## Polygon pours and split planes (outlines as drawn)
VCC on Top Layer "Vcc" (solid, remove dead copper, pour order 6): -160,-140 -160,4830 -140,4850 3300,4850 3300,-140
GND on Top Layer "Ground" (solid, pour order 2): 2620,2020 2620,1770 2290,1770 2290,1930 2300,1940 2390,1940
5V0 on Top Layer "5V0" (solid, pour order 0): 2300,2270 2460,2270 2530,2340 2530,2530 2480,2580 2290,2580
GND on Bottom Layer "Ground" (solid, pour order 8): 1470,740 1480,750 1690,750 1690,500 1680,490 1660,510 1450,510 1450,721.84 1459.08,730.92
GND on Bottom Layer "Ground" (solid, pour order 4): -160,-140 -150,-130 -150,4850 3300,4850 3300,-140

## Keep-outs
Keep-Out Layer:
  lines w10: -160,-150 3300,-150 3300,4850 -160,4850 -160,-150

## Other copper
Top Layer:
  text "CS 301 / Group 7" at 2550,4440 h60

## Silkscreen, mask and mechanical layers (free items; w line width, h text height)
Top Overlay:
  text "Vbat" at 210,3545 h40
  text "Ibat" at 195,3405 h40
  text "D1" at 200,3205 h40
  text "IN2" at 195,3105 h40
  text "IN1" at 195,3005 h40
  text "SLW" at 190,2915 h40
  text "INV" at 195,2815 h40
  text "D2" at 2865,2765 h40
  text "EN" at 200,2720 h40
  text "EN" at 2860,2660 h40
  text "D2" at 200,2610 h40
  text "INV" at 2840,2570 h40
  text "SLW" at 2840,2455 h40
  text "IN1" at 2855,2365 h40
  text "IN2" at 2840,2260 h40
  text "D1" at 2875,2140 h40